# EAGLE board msp432-standard-feather (EAGLE 9.5.2)
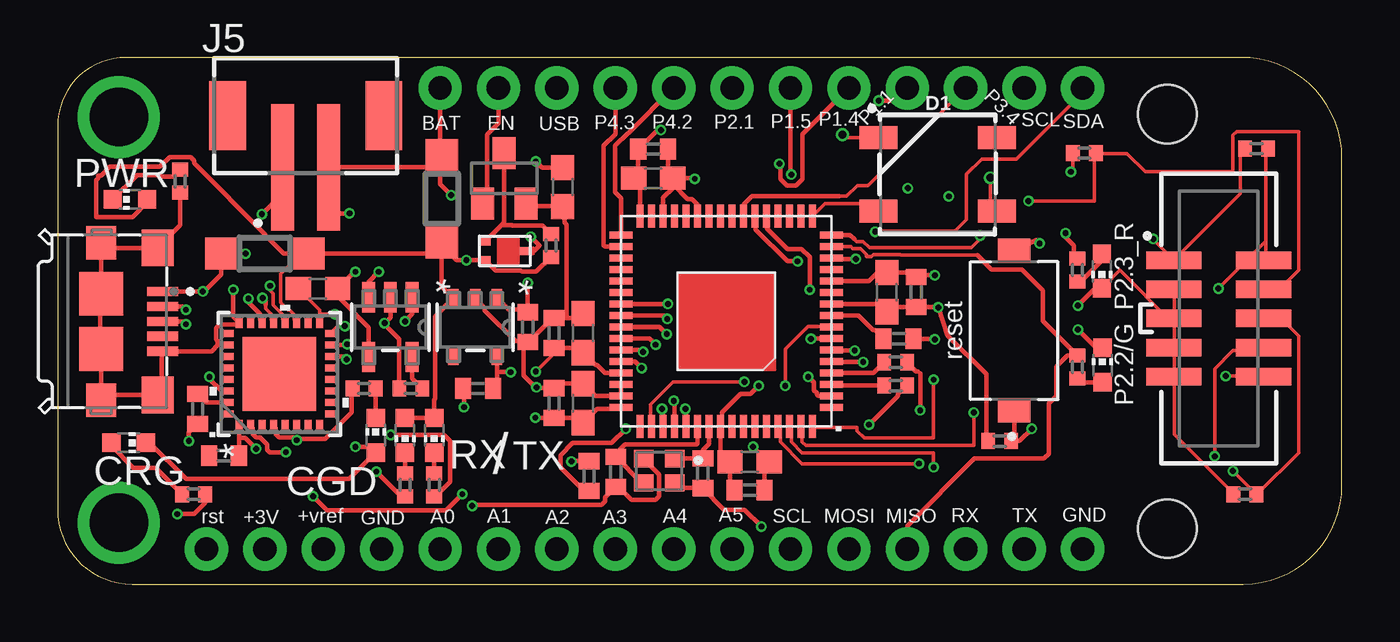
[diagram p0: board, top side]
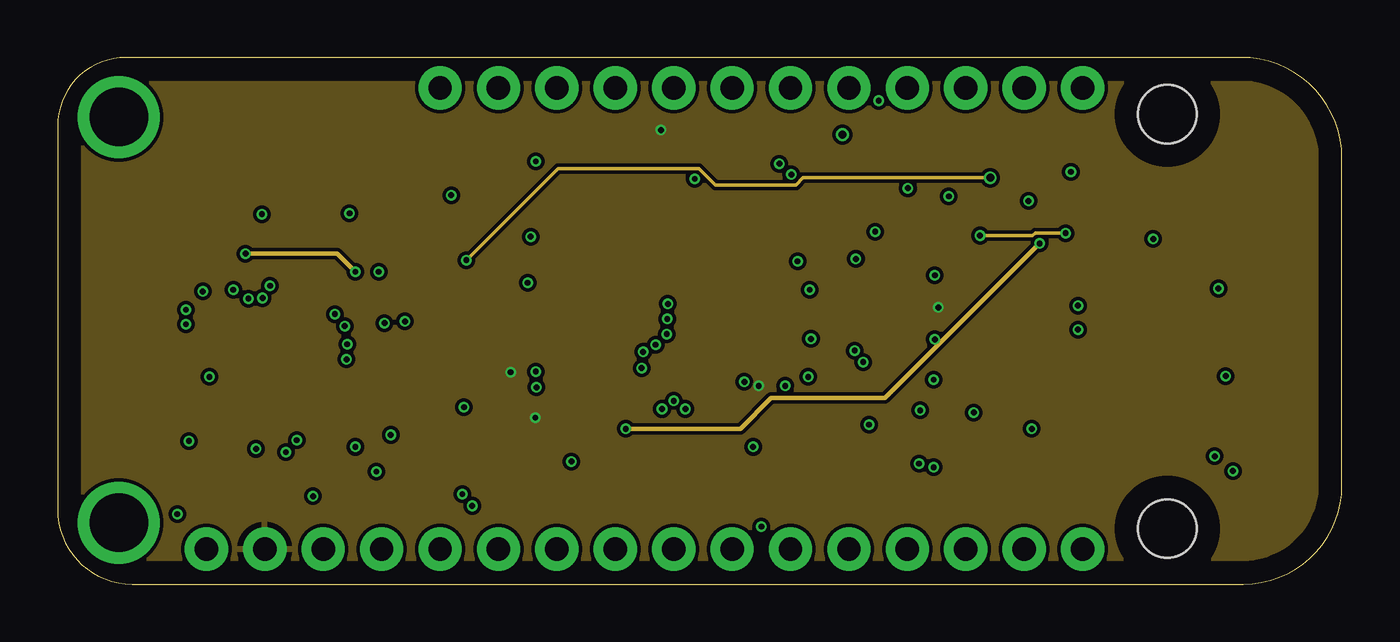
[diagram p1: board, inner layer Route2]
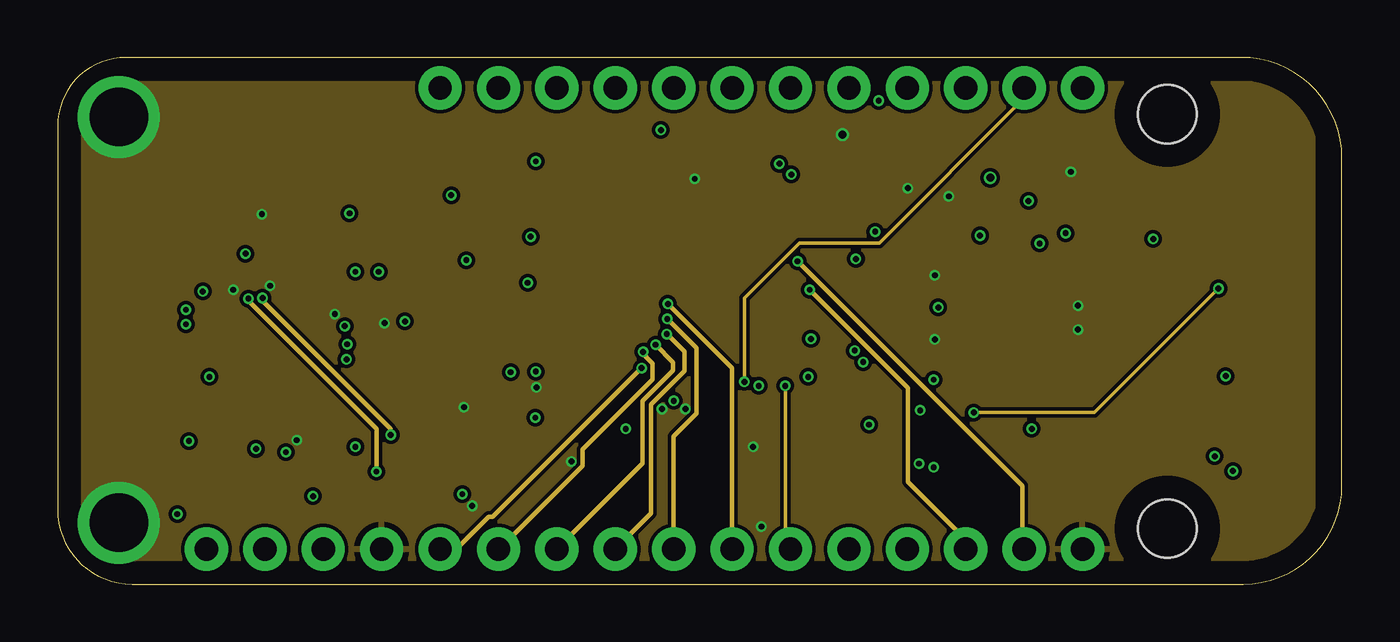
[diagram p2: board, inner layer Route15]
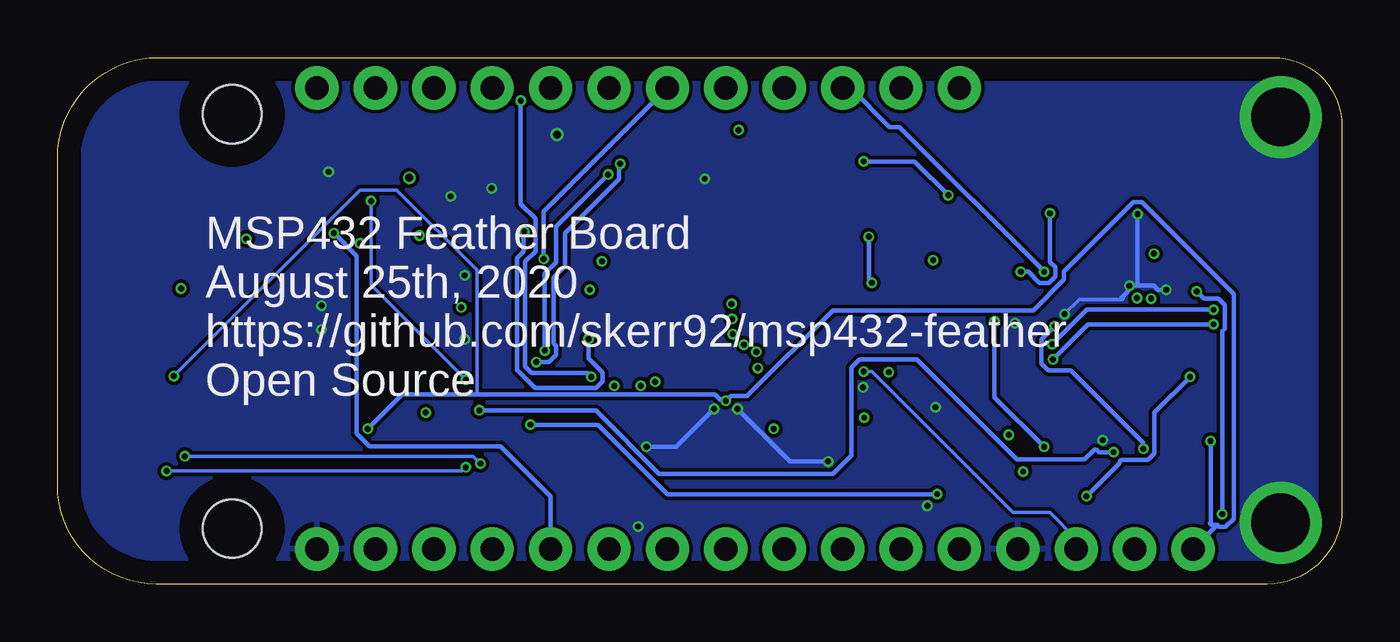
[diagram p3: board, bottom side, seen from below]

Size 55.86 x 22.91 mm. Coordinates in mm from the lower left corner, seen from the top.
Outline: 0,19.92 0,3.25 arc90 3.25,0 51.56,0 arc90 55.86,4.3 55.86,18.52 arc90 51.47,22.91 2.99,22.91 arc90 0,19.92
Copper layers (1+2*15+16): Top 0.035mm / dielectric 1.5mm / Route2 0.035mm / dielectric 0.15mm / Route15 0.035mm / dielectric 0.2mm / Bottom 0.035mm
Design rules "default *": minimum track width 6mil, minimum drill 10mil, track to track 6mil, track to pad 6mil, pad to pad 6mil, via to via 6mil, smd to smd 6mil, copper to edge 40mil, drill to drill 6mil, minimum pad ring 10mil, minimum via ring 4mil, stop-mask expansion 4mil, vias tented up to drill 35mil, thermal gap 10mil
Net classes: 0 default: width 0.152 mm, clearance 0.127 mm; 1 PWR: width 0.152 mm, clearance 0.127 mm; 2 analog: width 0.152 mm, clearance 0.152 mm; 3 digital: width 0.152 mm, clearance 0.152 mm
Holes 2.54 mm at 48.26,2.41 48.26,20.45

## Footprints (pad centres in the part's own frame; a part is rotated, then mirrored left to right if it is on the bottom)
C0603 = smd 1.1 x 1: 1 -0.85,0; 2 0.85,0
C0402 = smd 0.7 x 0.9: 1 -0.65,0; 2 0.65,0
CHIP-LED0603 = smd 0.8 x 0.8: A 0,-0.75; C 0,0.75
WS2812B = smd 1.651 x 1: 1 2.577,-1.6; 2 2.577,1.6; 3 -2.577,1.6; 4 -2.577,-1.6
2X5-SMD-1.27MM = smd 0.76 x 2.4: 1 2.54,1.95; 2 2.54,-1.95; 3 1.27,1.95; 4 1.27,-1.95; 5 0,1.95; 6 0,-1.95; 7 -1.27,1.95; 8 -1.27,-1.95; 9 -2.54,1.95; 10 -2.54,-1.95
TE_1981568-1 = smd 0.4 x 1.35: 1 -1.3,2.675; 2 -0.65,2.675; 3 0,2.675; 4 0.65,2.675; 5 1.3,2.675 | smd 1.6 x 1.4: 6 -3.2,2.45; 7 3.2,2.45 | smd 1.45 x 1.3: 8 3.425,0; 9 -3.425,0 | smd 1.9 x 1.9: 10 -1.2,0; 11 1.2,0
1X12_NO_SILK = drill 1.016 pad 1.88: 1 0,0; 2 2.54,0; 3 5.08,0; 4 7.62,0; 5 10.16,0; 6 12.7,0; 7 15.24,0; 8 17.78,0; 9 20.32,0; 10 22.86,0; 11 25.4,0; 12 27.94,0
1X16_NO_SILK = drill 1.016 pad 1.88: 1 0,0; 2 2.54,0; 3 5.08,0; 4 7.62,0; 5 10.16,0; 6 12.7,0; 7 15.24,0; 8 17.78,0; 9 20.32,0; 10 22.86,0; 11 25.4,0; 12 27.94,0; 13 30.48,0; 14 33.02,0; 15 35.56,0; 16 38.1,0
JST_B2B-PH-SM4-TB(LF)(SN) = smd 1 x 5.5: 1 -1,0; 2 1,0 | smd 1.6 x 3: 3 -3.4,2.25; 4 3.4,2.25
R0402 = smd 0.6 x 0.7: 1 -0.5,0; 2 0.5,0
SW_KSR223GLFG = smd 1 x 1.4: 1 -3.5,0; 2 3.5,0
FT232RQ-REEL_FTD = smd 0.508 x 0.305: 1 -2.246,1.75; 2 -2.246,1.25; 3 -2.246,0.75; 4 -2.246,0.25; 5 -2.246,-0.25; 6 -2.246,-0.75; 7 -2.246,-1.25; 8 -2.246,-1.75; 17 2.246,-1.75; 18 2.246,-1.25; 19 2.246,-0.75; 20 2.246,-0.25; 21 2.246,0.25; 22 2.246,0.75; 23 2.246,1.25; 24 2.246,1.75 | smd 0.305 x 0.508: 9 -1.75,-2.246; 10 -1.25,-2.246; 11 -0.75,-2.246; 12 -0.25,-2.246; 13 0.25,-2.246; 14 0.75,-2.246; 15 1.25,-2.246; 16 1.75,-2.246; 25 1.75,2.246; 26 1.25,2.246; 27 0.75,2.246; 28 0.25,2.246; 29 -0.25,2.246; 30 -0.75,2.246; 31 -1.25,2.246; 32 -1.75,2.246 | smd 3.2 x 3.2: 33 0,0
DBV5_TEX-L = smd 0.775 x 0.457: 1 -1.264,0.95; 2 -1.264,0; 3 -1.264,-0.95; 4 1.264,-0.95; 5 1.264,0.95
X2-DFN2015-3 = smd 0.5 x 0.31: 1 1.3,0.65; 2 -0.45,1.05; 3 -0.45,0.25
SOT-23-5_MC = smd 1.321 x 0.559: 1 -1.295,0.95; 2 -1.295,0; 3 -1.295,-0.95; 4 1.295,-0.95; 5 1.295,0.95
MSP432_QFN_64 = smd 1 x 0.3: 1 -4.575,3.75; 2 -4.575,3.25; 3 -4.575,2.75; 4 -4.575,2.25; 5 -4.575,1.75; 6 -4.575,1.25; 7 -4.575,0.75; 8 -4.575,0.25; 9 -4.575,-0.25; 10 -4.575,-0.75; 11 -4.575,-1.25; 12 -4.575,-1.75; 13 -4.575,-2.25; 14 -4.575,-2.75; 15 -4.575,-3.25; 16 -4.575,-3.75; 33 4.575,-3.75; 34 4.575,-3.25; 35 4.575,-2.75; 36 4.575,-2.25; 37 4.575,-1.75; 38 4.575,-1.25; 39 4.575,-0.75; 40 4.575,-0.25; 41 4.575,0.25; 42 4.575,0.75; 43 4.575,1.25; 44 4.575,1.75; 45 4.575,2.25; 46 4.575,2.75; 47 4.575,3.25; 48 4.575,3.75 | smd 0.3 x 1: 17 -3.75,-4.575; 18 -3.25,-4.575; 19 -2.75,-4.575; 20 -2.25,-4.575; 21 -1.75,-4.575; 22 -1.25,-4.575; 23 -0.75,-4.575; 24 -0.25,-4.575; 25 0.25,-4.575; 26 0.75,-4.575; 27 1.25,-4.575; 28 1.75,-4.575; 29 2.25,-4.575; 30 2.75,-4.575; 31 3.25,-4.575; 32 3.75,-4.575; 49 3.75,4.575; 50 3.25,4.575; 51 2.75,4.575; 52 2.25,4.575; 53 1.75,4.575; 54 1.25,4.575; 55 0.75,4.575; 56 0.25,4.575; 57 -0.25,4.575; 58 -0.75,4.575; 59 -1.25,4.575; 60 -1.75,4.575; 61 -2.25,4.575; 62 -2.75,4.575; 63 -3.25,4.575; 64 -3.75,4.575
SOD3716X117(SOD-123) = smd 1.4 x 1.4: 1 -1.9,0.051; 2 1.9,0.051
BSS138 = smd 1 x 1.4: D 0,1.1; G -0.95,-1.1; S 0.95,-1.1
XTAL_ECS-480-10-37-JTN-TR = smd 0.85 x 0.75: 1 -0.675,-0.525; 2 0.675,-0.525; 3 0.675,0.525; 4 -0.675,0.525

## Placement (x,y rotation side)
C1  4.7uF  [C0603]  22.86,7.87 90 top
C2  0.1uF  [C0402]  21.59,7.87 90 top
C3  4.7uF  [C0603]  25.91,17.65 0 top
C4  0.1uF  [C0402]  25.91,18.92 0 top
C5  4.7uF  [C0603]  36.07,12.7 90 top
C6  0.1uF  [C0402]  37.34,12.7 90 top
C7  4.7uF  [C0603]  30.1,5.31 0 top
C8  0.1uF  [C0402]  30.1,4.09 0 top
C9  0.1uF  [C0402]  36.58,10.67 0 top
C10  47nF  [C0402]  21.59,10.92 90 top
C11  4.7uF  [C0603]  22.86,10.92 90 top
C12  1.1nF  [C0402]  23.11,4.7 90 top
C13  [C0402]  20.45,11.18 270 top
C14  [C0402]  18.29,8.51 180 top
C15  [C0402]  7.24,5.59 180 top
C16  22pF  [C0402]  24.28,4.88 270 top
C17  22pF  [C0402]  28.07,4.83 270 top
C18  [C0402]  6.1,7.62 270 top
C20  10uF  [C0603]  11.33,12.85 180 top
C21  10uF  [C0603]  21.97,17.27 270 top
CGD  [CHIP-LED0603]  13.84,6.48 0 top
CRG  [CHIP-LED0603]  3.1,6.15 270 top
D1  WS2812B  [WS2812B]  38.28,17.83 0 top
J1  JTAG  [2X5-SMD-1.27MM]  50.5,11.56 90 top
J2  1981568-1  [TE_1981568-1]  1.91,11.43 270 top
J3  [1X12_NO_SILK]  16.64,21.59 0 top
J4  [1X16_NO_SILK]  6.48,1.52 0 top
J5  B2B-PH-SM4-TB(LF)(SN)  [JST_B2B-PH-SM4-TB(LF)(SN)]  10.79,18.14 0 top
P2.2/G  [CHIP-LED0603]  45.44,9.53 0 top
P2.3_R  [CHIP-LED0603]  45.42,13.61 180 top
PWR  [CHIP-LED0603]  3.15,16.74 90 top
R1  47K  [R0402]  40.97,6.22 180 top
R2  1K  [R0402]  36.45,9.65 0 top
R3  1K  [R0402]  36.45,8.64 0 top
R4  [R0402]  15.11,4.32 90 top
R5  220  [R0402]  44.35,13.67 90 top
R6  220  [R0402]  44.35,9.45 90 top
R7  [R0402]  16.38,4.32 90 top
R8  [R0402]  5.33,17.53 90 top
R9  100K  [R0402]  21.46,14.73 90 top
R10  2K2  [R0402]  15.37,8.51 180 top
R11  470  [R0402]  5.92,3.91 0 top
R12  470  [R0402]  13.34,8.51 0 top
R13  10k  [R0402]  51.64,3.91 180 top
R14  10k  [R0402]  52.15,18.95 180 top
R15  10k  [R0402]  44.65,18.75 180 top
RX  [CHIP-LED0603]  15.11,6.48 180 top
S2  KSR223GLFG  [SW_KSR223GLFG]  41.61,11.02 90 top
TX  [CHIP-LED0603]  16.38,6.48 180 top
U1  FT232RQ-REEL  [FT232RQ-REEL_FTD]  9.65,9.14 90 top
U2  TLV75533PDBVRDBV5_TEX-L  [DBV5_TEX-L]  18.16,11.18 270 top
U4  DMG3415U-7X2-DFN2015-3  [X2-DFN2015-3]  19.05,13.84 0 top
U5  MCP73831T-2ACI/OT  [SOT-23-5_MC]  14.48,11.18 270 top
U$1  MSP432P401MIRGCR  [MSP432_QFN_64]  29.08,11.43 180 top
U$4  MBR0520LT1G  [SOD3716X117(SOD-123)]  9.02,14.43 180 top
U$5  BSS138  [BSS138]  19.43,17.65 0 top
U$6  MBR0520LT1G  [SOD3716X117(SOD-123)]  16.76,16.76 90 top
Y2  ECS-480-10-37-JTN-TR  [XTAL_ECS-480-10-37-JTN-TR]  26.16,4.93 180 top

## Library data of the parts
C1-C18 C20 C21 = rcl; SPICEPREFIX: C
CGD CRG P2.2/G P2.3_R PWR = led
D1 = SparkFun-LED; PROD_ID: DIO-12503
J1 = SparkFun-Connectors; PROD_ID: CONN-14503
J2 = 1981568-1; AVAILABILITY: Unavailable; DESCRIPTION: USB - micro B USB 2.0 Receptacle Connector 5 Position Surface Mount, Right Angle; MF: TE Connectivity; MP: 19815681; PACKAGE: None; PRICE: None; TE_PURCHASE_URL: https://www.te.com/usa-en/product-19815681.html?te_bu=Cor&te_type=disp&te_campaign=seda_glo_cor-seda-global-disp-prtnr-fy19-seda-model-bom-cta_sma-317_1&elqCampaignId=32493
J3 J4 = SparkFun-Connectors
J5 = B2B-PH-SM4-TB_LF__SN_; AVAILABILITY: Unavailable; DESCRIPTION: Connector Header Surface Mount 2 position 0.079 _2.00mm_; MF: JST Sales; MP: B2B-PH-SM4-TB_LF__SN_; PACKAGE: None; PRICE: None
R1-R15 = rcl; SPICEPREFIX: R
RX TX = adafruit
S2 = KSR223GLFG; AVAILABILITY: Unavailable; DESCRIPTION: Tactile Switch SPST-NO Top Actuated Surface Mount; MF: C&K; MP: KSR223GLFG; PACKAGE: None; PRICE: None
U1 = FT232RQ-; BUILT_BY: EMA_Colton; COPYRIGHT: Copyright (C) 2018 Accelerated Designs. All rights reserved; DATASHEET: https://datasheet.octopart.com/FT232RQ-REEL-FTDI-datasheet-11992319.pdf; MANUFACTURER_PART_NUMBER: FT232RQ-REEL; SOURCELIBRARY: FTDI_2020-02-06; VENDOR: FTDI
U2 = TLV75533pdbvr; COPYRIGHT: Copyright (C) 2018 Accelerated Designs. All rights reserved; MANUFACTURER_PART_NUMBER: TLV75533PDBVR; SOURCELIBRARY: TI_2019-06-18; VENDOR: Texas Instruments
U4 = DMG3415U-7
U5 = MCP73831-2ACI; BUILT_BY: EMA_UL_Team; MANUFACTURER_PART_NUMBER: MCP73831T-2ACI/OT; VENDOR: Microchip
U$1 = MSP432P401MIRGCR; AVAILABILITY: Unavailable; DESCRIPTION: ARM® Cortex®-M4F MSP432™ Microcontroller IC 32-Bit 48MHz 128KB _128K x 8_ FLASH 64-VQFN _9x9_; MF: Texas Instruments; MP: MSP432P401MIRGCR; PACKAGE: VQFN-64 Texas Instruments; PRICE: None
U$4 U$6 = MBR0520LT1G; AVAILABILITY: Unavailable; DESCRIPTION: Diode Schottky 20V 500mA Surface Mount SOD-123; MF: ON Semiconductor; MP: MBR0520LT1G; PACKAGE: SOD-123 ON Semiconductor; PRICE: None
U$5 = BSS138; AVAILABILITY: Unavailable; DESCRIPTION: N-Channel 50V 220mA _Ta_ 360mW _Ta_ Surface Mount Die; MF: MICROSS/On Semiconductor; MP: BSS138; PACKAGE: TO-236-3 Micross; PRICE: None
Y2 = ECS-480-10-37-JTN-TR; AVAILABILITY: Unavailable; DESCRIPTION: 48MHz ±20ppm Crystal 10pF 50 Ohms 4-SMD, No Lead; MF: ECS Inc.; MP: ECS-480-10-37-JTN-TR; PACKAGE: SMD-4 ECS International; PRICE: None

## Nets
3.3V: J1.1 R14.2
+3.3V [PWR]: C1.1 C2.1 C3.1 C4.1 C5.1 C6.1 C7.1 C8.1 C14.1 J4.2 R1.2 U2.5 U$1.10 U$1.32 U$1.48 U$1.56
+5V: D1.1 PWR.A R9.1 RX.A TX.A U1.19 U2.3 U4.3 U$4.1 U$6.1
A0 [analog]: J4.5 U$1.44
A1 [analog]: J4.6 U$1.43
A2 [analog]: J4.7 U$1.42
A3 [analog]: J4.8 U$1.41
A4 [analog]: J4.9 U$1.40
A5 [analog]: J4.10 U$1.39
DM: J2.2 U1.15
DP: J2.3 U1.14
EN: J3.2 U$5.G
GND [PWR]: C1.2 C2.2 C3.2 C4.2 C5.2 C6.2 C7.2 C8.2 C9.2 C10.2 C11.2 C12.2 C13.2 C14.2 C16.2 C17.2 C20.2 C21.2 D1.3 J1.3 J1.5 J1.7 J1.9 J2.5 J2.6 J2.7 J2.8 J2.9 J2.10 J2.11 J4.4 J4.16 J5.1 P2.2/G.C P2.3_R.C R8.1 R10.2 R12.1 R13.2 R15.2 U1.4 U1.17 U1.20 U1.24 U1.26 U2.2 U5.2 U$1.12 U$1.27 U$1.30 U$1.46 U$1.47 U$1.51 U$1.53 U$5.S Y2.2 Y2.4
MISO [digital]: J4.13 R6.2 U$1.15
MOSI [digital]: J4.12 R5.2 U$1.16
N$1: C9.1 U$1.9
N$2: R10.1 U5.5
N$3: C15.1 U1.1 U1.16
N$4: C18.1 U1.31
N$5: R7.1 U1.21
N$6: R4.1 U1.22
N$7: R4.2 RX.C
N$8: R7.2 TX.C
N$9: J1.4 R15.1 U$1.64
N$10: C12.1 S2.2
N$11: J1.2 R14.1 U$1.63
N$12: PWR.C R8.2
N$13: P2.2/G.A R6.1
N$14: R2.1 U$1.4
N$15: R3.1 U$1.3
N$16: J1.6 R13.1 U$1.62
N$17: R9.2 U4.2 U$5.D
N$18: CGD.A CRG.C U5.1
N$19: J1.8 U$1.61
N$20: D1.4 U$1.17
N$24: CGD.C R12.2
N$25: CRG.A R11.1
N$42: P2.3_R.A R5.1
N$47: C16.1 U$1.54 Y2.3
N$48: C17.1 U$1.55 Y2.1
P1.0 [digital]: U$1.1
P1.1 [digital]: J3.9 U$1.2
P1.4 [digital]: J3.8 U$1.5
P1.5 [digital]: J3.7 U$1.6
P2.0: U$1.13
P2.1 [digital]: J3.6 U$1.14
P3.0: U$1.19
P3.1: U$1.20
P3.4 [digital]: J3.10 U$1.23
P3.5 [digital]: U$1.24
P4.2: J3.5 U$1.33
P4.3: J3.4 U$1.34
RST: C18.2 J1.10 J4.1 R1.1 S2.1 U$1.52
RX [digital]: J4.14 U$1.21
RXD: R2.2 U1.2
SCL [analog]: J4.11 U$1.8
SCL1 [analog]: J3.11 U$1.50
SDA [analog]: J3.12 U$1.7
TX [digital]: J4.15 U$1.22
TXD: R3.2 U1.30
VBAT [PWR]: C21.1 J3.1 J5.2 U5.3 U$6.2
VIN [PWR]: C13.1 U2.1 U4.1
VREF+ [analog]: C10.1 C11.1 J4.3 U$1.45
VUSB [PWR]: C20.1 J2.1 J3.3 R11.2 U5.4 U$4.2

## Tracks (layer width: path | path; a pad name or v marks a point on that pad's centre or on a via)
3.3V  (via drill 0.25)
  Top 0.152: R14.2 51.59,18.89 51.44,18.73 51.44,16.99 48.58,14.13 J1.1 47.65,14.99 v47.65,15.01
+3.3V  (via drill 0.25)
  Top 0.203: C8.1 29.25,4.29 C7.1 28.83,5.72 U$1.56 28.89,6.93 28.89,7.47 29.69,8.27 30.14,8.27 v30.49,8.62 | U$1.48 24.45,7.62 23.46,7.62 C1.1 22.66,7.22 C2.1 20.79,7.22 v20.78,7.24 | U2.5 19.11,9.27 | 19.11,9.27 19.11,8.68 C14.1 | 19.11,9.27 19.16,9.22 v19.71,9.22 | R1.2 40.4,6.29 40.4,9.13 38.71,10.82 v38.3,12.04 v38.29,12.05 C6.1 36.27,12.05 C5.1 35.74,12.18 U$1.10 33.65,12.17 | 25.34,15.91 U$1.32 25.33,17.38 C3.1 25.25,17.6 25.25,18.85 C4.1 26.09,19.75 v26.24,19.75
  pour Route2: -3.81,31.75 57.15,31.75 57.15,-10.16 -3.81,-10.16
+5V  (via drill 0.25, 0.35)
  Top 0.152: U1.19 10.28,11.51 10.28,11.74 10.1,11.92 10.04,11.92 9.7,12.26 9.7,13.48 10.59,14.38 | D1.1 40.56,16.52 v40.56,17.68
  Top 0.203: 16.71,14.73 U$6.1 16.23,14.38 U$4.1 10.59,14.38 9.84,14.38 9.04,15.18 9.04,15.22 5.94,18.32 5.94,18.43 5.79,18.58 4.88,18.58 4.45,18.16 2.27,18.16 1.9,17.78 1.78,17.78 1.78,17.66 1.7,17.57 1.7,15.98 3.27,15.98 3.9,16.61 PWR.A | 16.71,14.73 16.71,12.94 U2.3 16.42,11.65 16.42,8.05 16.38,8.02 TX.A RX.A | 16.71,14.73 17.35,14.09 v17.78,14.09 U4.3 19.04,13.65 20.13,13.65 20.19,13.59 20.82,13.59 R9.1
  Route2 0.152: v40.56,17.68 32.42,17.68 32.11,17.36 28.62,17.36 27.9,18.09 21.77,18.09 v17.78,14.09
A0  (via drill 0.25)
  Top 0.203: U$1.44 25.12,9.68 v25.4,9.4
  Route15 0.203: v25.4,9.4 18.92,2.92 18.76,2.92 17.36,1.52 J4.5
A1  (via drill 0.25)
  Top 0.203: U$1.43 25.39,10.18 v25.47,10.1
  Route15 0.203: v25.47,10.1 25.47,10.02 25.88,9.6 25.88,8.9 22.84,5.85 22.84,5.13 19.22,1.52 J4.6
A2  (via drill 0.25)
  Top 0.203: U$1.42 25.75,10.68 v26.01,10.41
  Route15 0.203: v26.01,10.41 26.77,9.65 26.77,9.29 25.45,7.97 25.45,5.26 J4.7
A3  (via drill 0.25)
  Top 0.203: U$1.41 26.19,11.18 v26.5,10.87
  Route15 0.203: v26.5,10.87 27.26,10.11 27.26,9.27 25.81,7.82 25.81,3.07 J4.8
A4  (via drill 0.25)
  Top 0.203: U$1.40 26.37,11.68 v26.52,11.53
  Route15 0.203: v26.52,11.53 27.79,10.27 27.79,7.42 26.8,6.43 J4.9
A5  (via drill 0.25)
  Top 0.203: U$1.39 v26.53,12.18 v26.54,12.19
  Route15 0.203: v26.54,12.19 29.34,9.4 J4.10
DM  (via drill 0.25)
  Top 0.203: J2.2 5.45,12.08 v5.59,11.94 | v12.6,10.44 12.55,10.39 U1.15
  Bottom 0.203: v5.59,11.94 11.1,11.94 v12.6,10.44
DP  (via drill 0.25)
  Top 0.203: J2.3 5.46,11.43 v5.59,11.3 | v12.57,9.78 12.46,9.89 U1.14
  Bottom 0.203: v5.59,11.3 11.05,11.3 v12.57,9.78
EN
  Top 0.203: J3.2 19.18,20.06 18.68,19.56 18.68,16.75 U$5.G
GND  (via drill 0.25, 0.35, 2.54)
  Top 0.152: U1.17 11.4,11.75 | 11.4,11.75 11.4,11.93 C20.2 | U1.20 9.78,11.51 9.78,11.74 9.37,12.15 9.37,12.63 9.24,12.77 v9.24,12.98 | v12.06,11.75 11.4,11.75 | P2.3_R.C 45.56,13.02 46.2,13.65 48.42,11.43 J1.5 | J1.5 48.58,11.43 48.58,10.32 J1.7 48.58,10.16 48.58,9.05 J1.9 48.58,8.89 48.58,6.51 51.12,3.97 R13.2 | J1.3 48.58,12.7 48.58,11.59 J1.5 | D1.3 34.27,19.43 v34.14,19.56 | R15.2 44.15,18.02 v44.07,17.93
  Top 0.203: U$1.12 35.28,13.18 35.65,13.55 C5.2 37.14,13.55 C6.2 37.42,13.44 v38.15,13.44 | C8.2 30.75,5.11 C7.2 30.91,5.31 v30.25,5.97 | Y2.4 27.06,4.18 C17.2 28.07,4.16 28.99,3.23 29.88,3.23 v30.61,2.5 | U$1.51 26.33,7.58 v26.29,7.62 | v22.35,5.33 22.37,5.35 C12.2 | U$1.46 U$1.47 23.4,8.18 C1.2 21.79,8.72 C2.2 20.86,8.52 v20.83,8.56 20.8,8.53 20.27,9.07 20.27,10.49 C13.2 | C11.2 22.66,11.57 22.14,11.57 | 22.14,11.57 C10.2 21.51,11.56 20.54,10.58 C13.2 | v27.3,7.62 27.33,7.59 U$1.53 | U1.26 6.96,10.39 | 6.96,10.39 6.7,10.13 J2.5 4.53,10.05 4.53,8.36 4.45,8.27 J2.7 2.13,8.23 J2.8 J2.11 1.87,10.31 1.87,12.54 J2.10 J2.9 2.13,14.63 J2.6 5.33,15.61 R8.1 | 6.96,10.39 6.96,10.57 6.9,10.64 6.9,11.15 7.05,11.3 7.81,11.3 U1.24 7.64,11.64 v7.64,12.8 | C3.2 26.76,17.4 | 26.76,17.4 26.76,17.23 26.33,16.81 U$1.30 | 26.76,17.4 27.4,16.76 27.59,16.76 27.83,16.51 U$1.27 | C14.2 17.68,8.47 v17.68,7.7 | U5.2 14.48,11.61 v14.22,11.35 14.22,11.29 14.85,10.67 14.85,8.53 R10.2 | U1.20 9.88,11.41 | U1.4 9.5,6.8 9.5,6.54 9.64,6.39 10.28,6.39 v10.41,6.26 10.49,6.31 11.65,6.31 12.8,7.47 12.8,8.45 R12.1 | C9.2 38.12,10.67 v38.15,10.64 | v18.03,3.4 18.07,3.44 23.67,3.44 23.82,3.59 23.82,3.76 C16.2 24.4,4.23 24.96,3.67 26.02,3.67 26.17,3.82 26.17,4.78 26.02,4.93 26.01,4.93 Y2.2 | P2.2/G.C 45.17,10.28 v44.37,11.07 | P2.3_R.C 45.12,12.86 v44.37,12.12 | C3.2 26.56,17.85 C4.2 | C3.2 27.69,17.65 v27.71,17.63 | U$5.S 20.45,16.54 20.54,16.45 21.96,16.45 C21.2 22.05,16.36 22.05,15.73 22.14,15.65 22.14,11.57 | U2.2 18.22,12.36 18.58,12 18.58,11.91 19.91,10.58 20.45,10.58 C13.2 | v8.89,16.09 9.78,16.98 9.78,18.06 J5.1
  Bottom 0.152: v12.06,11.75 11.43,12.38 9.53,12.38 9.6,12.45
  Bottom 0.203: v26.29,7.62 24,5.33 v22.35,5.33 | v30.25,5.97 28.96,5.97 v27.3,7.62 | v7.64,12.8 8,12.8 8.18,12.98 8.89,12.98 | 8.89,12.98 9.07,12.98 9.6,12.45 9.53,12.45 | 8.89,12.98 v8.89,16.09
  other vias: 36.98,17.22 38.76,16.87 2.67,20.32 2.67,2.67
  pour Route15: -2.54,30.48 54.61,30.48 54.61,-8.89 -2.54,-8.89
  pour Bottom: -1.27,24.13 56.26,24.13 56.26,-1.27 -1.27,-1.27
MISO
  Top 0.152: U$1.15 34.5,14.68 34.58,14.6 34.91,14.6 35.18,14.34 35.18,14.25 35.39,14.25 35.47,14.33 36.66,14.33 36.69,14.3 40.01,14.3
  Top 0.203: 33.71,14.63 U$1.15 | 40.01,14.3 40.62,13.69 41.94,13.69 42.85,12.78 42.85,11.45 R6.2 43.92,9.95 43.43,9.47 43.43,8.2 43.1,7.87 43.1,5.67 42.9,5.46 39.88,5.46 36.96,2.54 J4.13
MOSI  (via drill 0.25)
  Top 0.152: v40.12,15.16 40.12,15 39.75,14.63 35.31,14.63 35.04,14.91 34.74,14.91 34.65,15
  Top 0.203: U$1.16 34.47,15.18 34.65,15 | v43.84,15.27 43.84,15.09 44.2,14.72 44.2,14.31 R5.2
  Route2 0.152: v40.12,15.16 42.41,15.16 42.52,15.28 42.9,15.28 42.91,15.27 v43.84,15.27
  Bottom 0.203: v43.84,15.27 42.85,14.28 42.85,6.56 42.29,5.99 36.6,5.99 34.42,3.81 J4.12
N$1
  Top 0.203: C9.1 35.55,11.05 35.46,11.05 34.83,11.68 U$1.9
N$2
  Top 0.203: R10.1 15.43,8.95 U5.5
N$3  (via drill 0.25)
  Top 0.203: C15.1 7.9,5.6 7.9,6.35 | 7.9,6.35 U1.1 | U1.16 12.23,11.22 v12.49,11.22 | v8.64,5.88 8.17,6.35 7.9,6.35
  Bottom 0.203: v8.64,5.88 8.64,6.14 11.8,9.3 12.77,9.3 13.08,9.6 13.08,10.64 v12.49,11.22
N$4
  Top 0.203: C18.1 6.47,7.89 U1.31
N$5  (via drill 0.25)
  Top 0.152: 9.04,12.14 9.04,11.98 9.28,11.74 9.28,11.51 9.35,11.44
  Top 0.203: 9.35,11.44 U1.21 | 9.04,12.14 9.04,12.32 v8.91,12.45 | v14.49,6.49 16.8,6.49 17.07,6.22 17.07,4.45 16.45,3.82 R7.1
  Route15 0.203: v14.49,6.49 14.49,6.76 8.88,12.36 v8.91,12.45
N$6  (via drill 0.25)
  Top 0.203: U1.22 8.81,11.48 8.81,11.75 8.31,12.25 v8.31,12.42 | v13.87,4.89 14.94,3.82 R4.1
  Route15 0.203: v13.87,4.89 13.87,6.76 8.27,12.36 v8.31,12.42
N$7
  Top 0.203: RX.C R4.2
N$8
  Top 0.203: TX.C R7.2
N$9  (via drill 0.25)
  Top 0.152: J1.4 52.55,12.86 53.18,12.86 53.98,13.65 53.98,19.68 51.28,19.68 51.12,19.53 51.12,17.94 47.31,17.94 46.51,18.73 45.24,18.73 R15.1 45.09,18.73 45.09,16.67 v42.23,16.67 | v38.1,8.89 38.1,6.35 35.08,6.35 34.77,6.67 34.77,6.83 32.86,6.83 U$1.64
  Bottom 0.152: v38.1,8.89 42.23,13.02 v42.23,16.67
N$10  (via drill 0.25)
  Top 0.203: v24.71,6.76 24.09,6.13 22.4,6.13 21.87,5.6 21.87,5.07 22.85,4.09 23.11,4.09 C12.1 | v42.71,14.82 42.57,14.96 S2.2
  Route2 0.203: v24.71,6.76 29.69,6.76 31.03,8.09 35.98,8.09 v42.71,14.82
N$11  (via drill 0.25)
  Top 0.152: 52.55,14.92 52.55,14.13 J1.2 | 52.55,14.92 52.55,18.89 R14.1 | v39.85,7.46 39.85,6.03 32.54,6.03 32.38,6.19 32.38,6.83 U$1.63 | 52.55,14.92 v50.48,12.86
  Route15 0.152: v39.85,7.46 45.09,7.46 v50.48,12.86
N$12
  Top 0.203: PWR.C 3.46,17.8 4.43,17.8 4.51,17.72 5.03,17.72 R8.2
N$13
  Top 0.203: P2.2/G.A 44.52,8.78 R6.1
N$14
  Top 0.203: R2.1 35.48,9.18 U$1.4
N$15
  Top 0.203: R3.1 33.7,8.64 U$1.3
N$16  (via drill 0.25)
  Top 0.152: J1.6 52.55,11.43 53.34,11.43 53.98,10.79 53.98,5.71 52.23,3.97 R13.1 52.07,3.97 v51.12,4.92 | v38.1,5.08 38.1,5.71 32.38,5.71 31.91,6.19 31.91,6.83 U$1.62
  Bottom 0.152: v38.1,5.08 38.26,4.92 v51.12,4.92
N$17
  Top 0.203: U$5.D 19.43,15.72 19.32,15.61 | 19.32,15.61 U4.2 | 19.32,15.61 19.77,15.61 19.78,15.6 21.1,15.6 R9.2
N$18  (via drill 0.25)
  Top 0.203: CRG.C 4.01,6.15 5.59,4.57 12.69,4.57 CGD.A 13.6,5.97 v12.95,5.97 | U5.1 15.43,11.74 v15.11,11.43
  Bottom 0.203: v15.11,11.43 15.11,8.13 v12.95,5.97
N$19  (via drill 0.25)
  Top 0.152: v37.47,5.24 32.38,5.24 31.43,6.19 31.43,6.83 U$1.61 | v50.32,5.56 50.32,9.37 51.12,10.16 52.39,10.16 J1.8
  Bottom 0.152: v37.47,5.24 37.78,5.56 v50.32,5.56
N$20
  Top 0.152: U$1.17 33.38,16.55 35.38,16.55 D1.4
N$24
  Top 0.203: R12.2 CGD.C
N$25
  Top 0.203: R11.1 4.27,5.06 3.29,5.06 2.35,6 CRG.A
N$42
  Top 0.203: P2.3_R.A 45.41,14.08 44.5,13.16 R5.1
N$47
  Top 0.203: Y2.3 25.41,4.4 C16.1 24.28,5.69 24.68,6.08 27.8,6.08 27.83,6.12 U$1.54
N$48
  Top 0.203: Y2.1 26.86,5.48 C17.1 28.07,5.84 28.33,6.11 U$1.55
P1.1  (via drill 0.25)
  Top 0.203: J3.9 36.4,21.03 v35.71,21.03 | v32.65,9.02 32.9,8.76 32.9,8.43 33.02,8.31 33.02,8.26 33.09,8.18 U$1.2
  Bottom 0.203: v35.71,21.03 35.71,16.54 35.08,15.9 35.08,14.47 35.52,14.03 35.52,9.46 35.24,9.18 32.81,9.18 v32.65,9.02
P1.4  (via drill 0.25)
  Top 0.203: J3.8 32.4,19.57 32.4,17.62 32.12,17.34 31.72,17.34 31.43,17.62 31.43,18.25 v31.39,18.29 | v35.04,9.66 33.67,9.66 U$1.5
  Bottom 0.203: v31.39,18.29 31.43,18.25 31.43,17.62 33.78,15.27 33.78,13.84 34.29,13.34 34.29,10.46 34.19,10.36 34.19,9.96 34.49,9.66 v35.04,9.66
P1.5  (via drill 0.25)
  Top 0.203: J3.7 31.88,17.86 v31.92,17.82 | v34.67,10.16 33.68,10.16 U$1.6
  Bottom 0.203: v34.67,10.16 34.67,13.52 34.19,14 34.19,15.55 v31.92,17.82
P2.1  (via drill 0.25)
  Top 0.203: U$1.14 33.69,14.15 v34.72,14.15
  Bottom 0.203: J3.6 34.72,16.2 v34.72,14.15
P3.4
  Top 0.152: J3.10 35.25,17.34 34.78,17.34 34.32,16.88 34.01,16.88
  Top 0.203: U$1.23 29.85,16.02 29.85,16.53 30.2,16.88 34.01,16.88
P4.2
  Top 0.203: J3.5 24.83,19.63 24.8,19.63 24.25,19.08 24.25,17.05 24.51,16.79 U$1.33
P4.3
  Top 0.203: J3.4 24.26,19.58 23.75,19.08 23.75,14.74 23.75,14.73 23.8,14.68 U$1.34
RST  (via drill 0.25)
  Top 0.152: v50.8,9.05 52.39,9.05 J1.10
  Top 0.203: U$1.52 26.83,7.41 26.82,7.42 26.82,7.95 v26.8,7.97 | v42.37,6.76 41.83,6.22 R1.1 41.6,6.36 S2.1 | C18.2 5.71,6.59 v5.71,6.22
  Bottom 0.152: v50.8,9.05 42.7,17.14 41.12,17.14 37.62,13.65 37.62,8.26
  Bottom 0.203: v42.37,6.76 40.87,8.26 37.62,8.26 27.26,8.26 26.98,7.97 v26.8,7.97 26.76,8 26.58,8.18 25.87,8.18 22.14,11.91 13.42,11.91 12.09,13.25 12.09,13.6 9.07,16.62 8.71,16.62 4.71,12.62 4.71,2.85 5.07,2.49 5.33,2.49 5.42,2.58 | v5.71,6.22 5.71,2.67 5.75,2.63 5.69,2.58 5.42,2.58 | 5.42,2.58 J4.1
RX  (via drill 0.25)
  Top 0.203: v32.72,12.8 32.72,14.22 32.36,14.58 31.74,14.58 30.85,15.47 30.85,16 U$1.21
  Route15 0.203: v32.72,12.8 36.98,8.53 36.98,4.45 39.09,2.34 J4.14
RXD  (via drill 0.25)
  Top 0.203: U1.2 8.5,6.8 8.5,6.54 8.64,6.39 8.81,6.39 9.12,6.08 9.12,5.84 9.22,5.74 v9.93,5.74 | v37.52,7.56 37.52,9.16 37.43,9.25 37.34,9.25 36.98,9.6 R2.2
  Bottom 0.203: v9.93,5.74 10.56,5.74 10.67,5.84 10.76,5.87 11.2,5.42 14.13,5.42 18.49,9.78 20.98,9.78 21.34,9.42 21.34,5.6 22.14,4.8 29.69,4.8 32.45,7.56 v37.52,7.56
SCL  (via drill 0.25)
  Top 0.152: v31.65,8.62 31.65,10.22 32.63,11.2 33.6,11.2 U$1.8
  Route15 0.152: v31.65,8.62 31.65,1.75 J4.11
SCL1  (via drill 0.25)
  Top 0.152: v29.87,8.8 26.76,8.8 25.78,7.82 25.78,6.93 U$1.50
  Route15 0.152: v29.87,8.8 29.87,12.45 32.27,14.85 35.74,14.85 41.95,21.06 J3.11
SDA  (via drill 0.25)
  Top 0.152: 39.01,15.33 39.52,15.85 39.52,17.83 40.19,18.5 41.7,18.5 44.1,20.9 44.58,20.9
  Top 0.203: 44.58,20.9 J3.12 | 39.01,15.33 v35.56,15.33 | v32.77,10.67 v32.78,10.68 U$1.7
  Bottom 0.203: v35.56,15.33 35.59,15.31 35.59,14.47 35.87,14.18 35.87,9.31 35.09,8.53 32.45,8.53 32.17,8.82 32.17,9.22 32.77,9.82 v32.77,10.67
TX  (via drill 0.25)
  Top 0.203: v32.18,14.05 31.74,14.05 30.35,15.43 30.35,16 U$1.22
  Route15 0.203: v32.18,14.05 41.96,4.27 41.96,1.57 J4.15
TXD  (via drill 0.25)
  Top 0.203: U1.30 7.14,8.39 6.6,8.93 v6.6,9.02 | v35.29,6.93 36.54,8.18 36.54,8.27 36.89,8.62 R3.2 | v17.6,3.91 16.89,3.2 11.73,3.2 v11.11,3.82
  Bottom 0.203: v6.6,9.02 8.15,7.47 8.15,5.68 8.44,5.4 9.59,5.4 9.65,5.33 9.69,5.25 v11.11,3.82 | v35.29,6.93 32.36,6.93 29.34,3.91 v17.6,3.91
VBAT  (via drill 0.25)
  Top 0.203: 16.64,18.59 16.18,18.14 J5.2 11.79,16.4 12.06,16.13 v12.7,16.13 | 16.64,18.59 | 16.64,18.59 U$6.2 | J3.1 16.64,18.59 | U5.3 13.53,13.15 v13.97,13.59 | C21.1 21.07,18.12 v20.8,18.39 | v17.12,16.92 16.64,17.4 16.64,18.59
  Bottom 0.203: v13.97,13.59 13.64,13.59 13.15,13.11 12.75,13.11 12.47,13.39 12.47,13.79 12.7,14.02 v12.7,16.13 | v20.8,18.39 18.59,18.39 v17.12,16.92
VIN  (via drill 0.25)
  Top 0.203: U4.1 20.71,14.49 20.95,14.73 20.86,14.83 v20.57,15.11 | v20.45,13.11 20.45,11.94 | 20.45,11.94 C13.1 | U2.1 19.61,11.94 20.45,11.94
  Bottom 0.203: v20.57,15.11 20.57,13.23 v20.45,13.11
VREF+  (via drill 0.25)
  Top 0.152: v20.8,9.25 21.51,9.96 21.51,10.22 C10.1
  Top 0.203: U$1.45 23.81,9.18 23.46,9.53 23.4,9.53 C11.1 22.66,10.27 C10.1
  Bottom 0.152: v20.8,9.25 20.45,9.25 14.31,3.11 12.71,3.11 11.56,1.96 J4.3
VUSB  (via drill 0.25)
  Top 0.203: J2.1 v6.32,12.73 6.35,12.7 7.12,13.47 U$4.2 | U$4.2 7.48,14.38 | U5.4 13.53,11.17 12.18,12.52 C20.1 12.91,13.59 v12.95,13.59 | R11.2 6.43,3.53 5.95,3.05 v5.21,3.05 | U$4.2 v8.18,14.38
  Route2 0.203: v8.18,14.38 12.17,14.38 v12.95,13.59
  Bottom 0.203: v12.95,13.59 19.25,19.89 19.67,19.89 21.37,21.59 J3.3 | v5.21,3.05 5.21,11 5.11,11.1 5.11,12.14 5.39,12.42 6.01,12.42 v6.32,12.73

## Text on the board
tNames: BAT | EN | USB | P4.3 | P4.2 | P2.1 | P1.5 | P1.4 | P1.1 | SCL | P3.4 | SDA | reset | . | . | / | rst | +3V | +vref | GND | A0 | A1 | A2 | A3 | A4 | A5 | SCL | MOSI | MISO | RX | TX | GND
bNames: MSP432 Feather Board / August 25th, 2020 / https://github.com/skerr92/msp432-feather / Open Source